# Altium PCB EtherWiz_3K4KNic.PcbDoc (part 1 of 2)
Units mil, origin at the board's own origin, x right, y up, seen from the top; angles counter-clockwise.
Board outline 3909 x 1834 mil, 4 copper layers (Top Layer, GND, 5V, Bottom Layer), stack 62.295 mil thick; 71 components, 121 nets, 446 pads, 217 vias.
Unrouted connection lines stored in the file: 7.
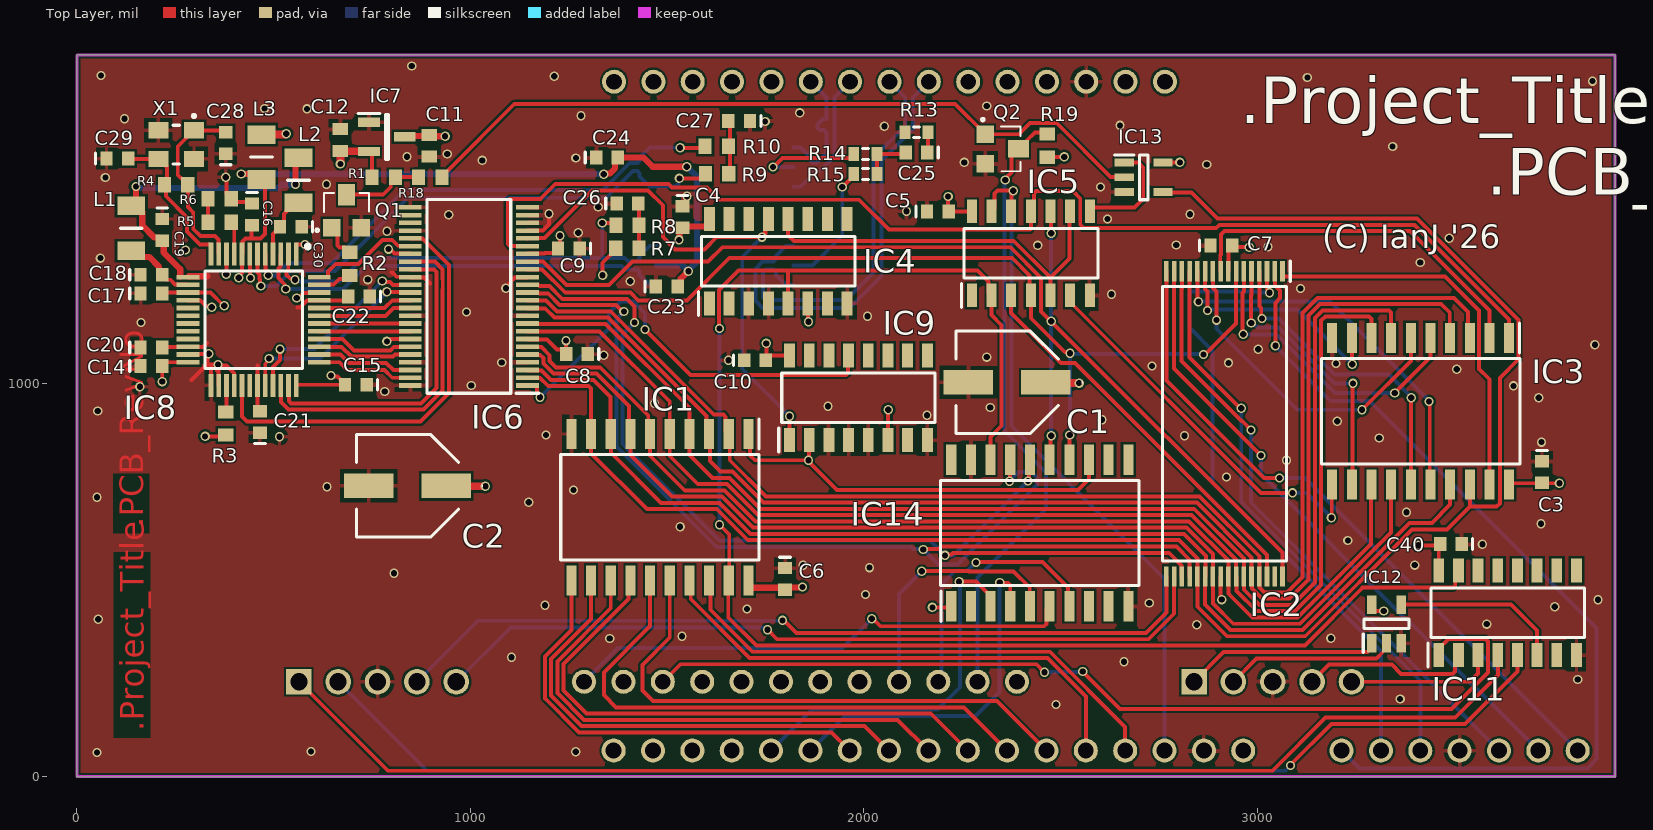
[diagram p0: Top Layer view]
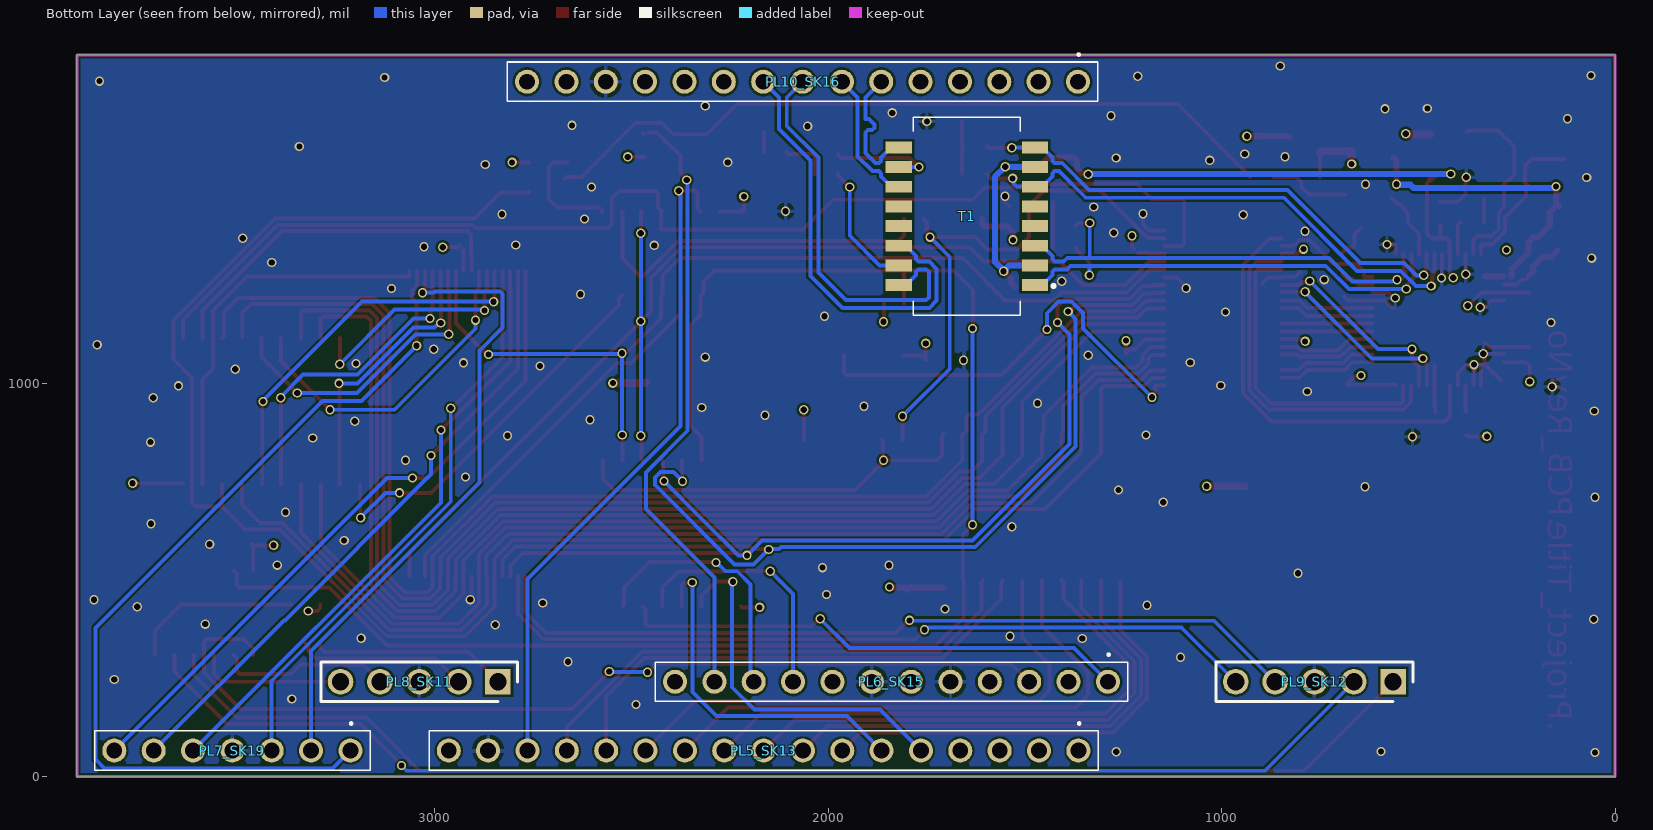
[diagram p1: Bottom Layer view, seen from below]
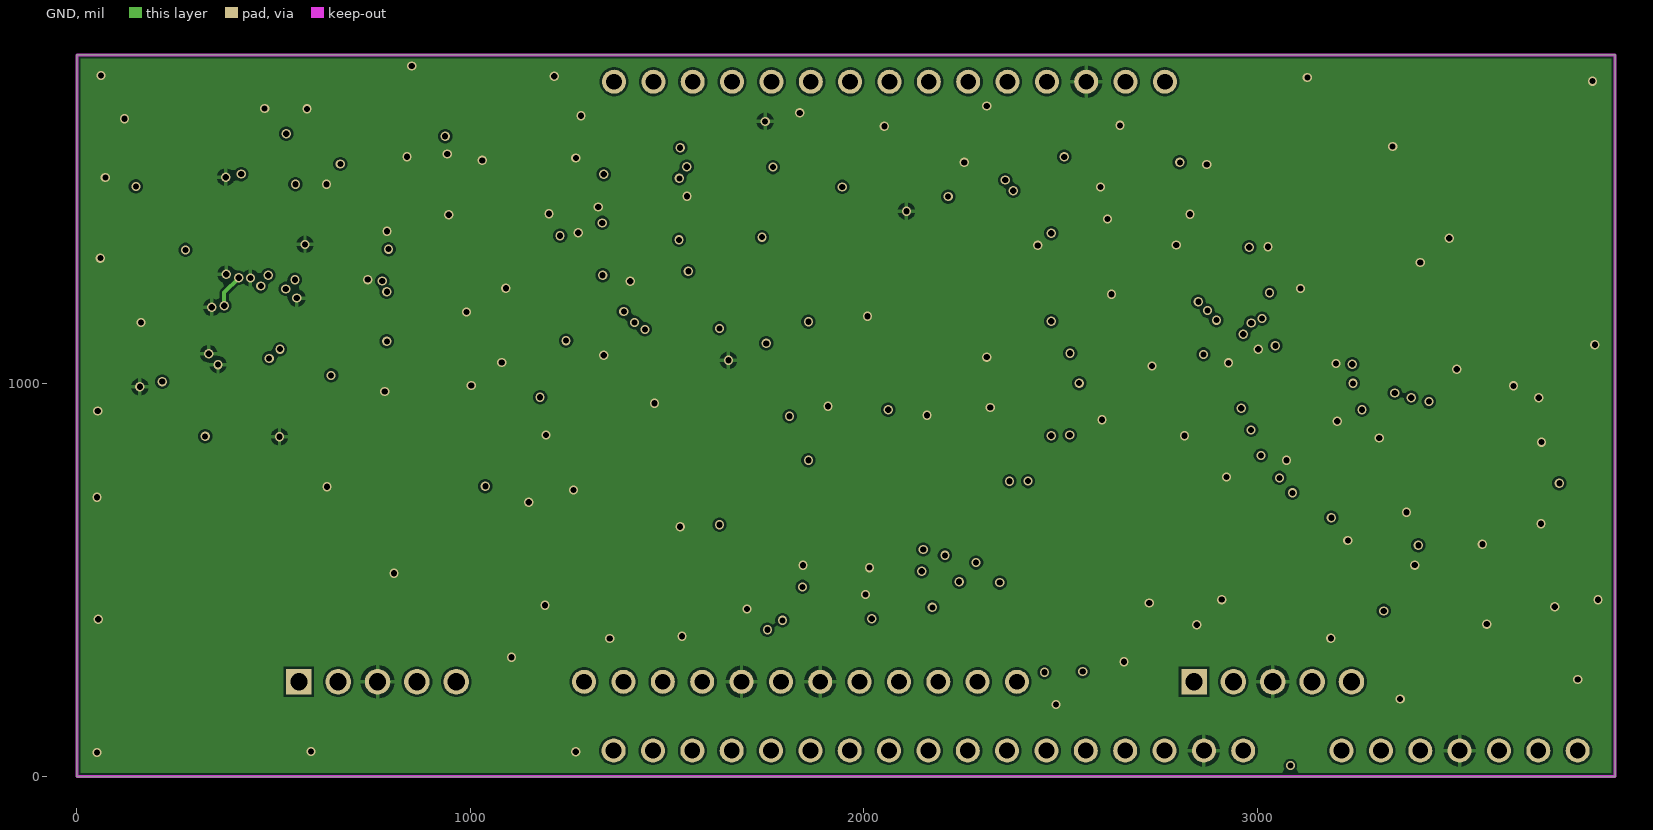
[diagram p2: GND]
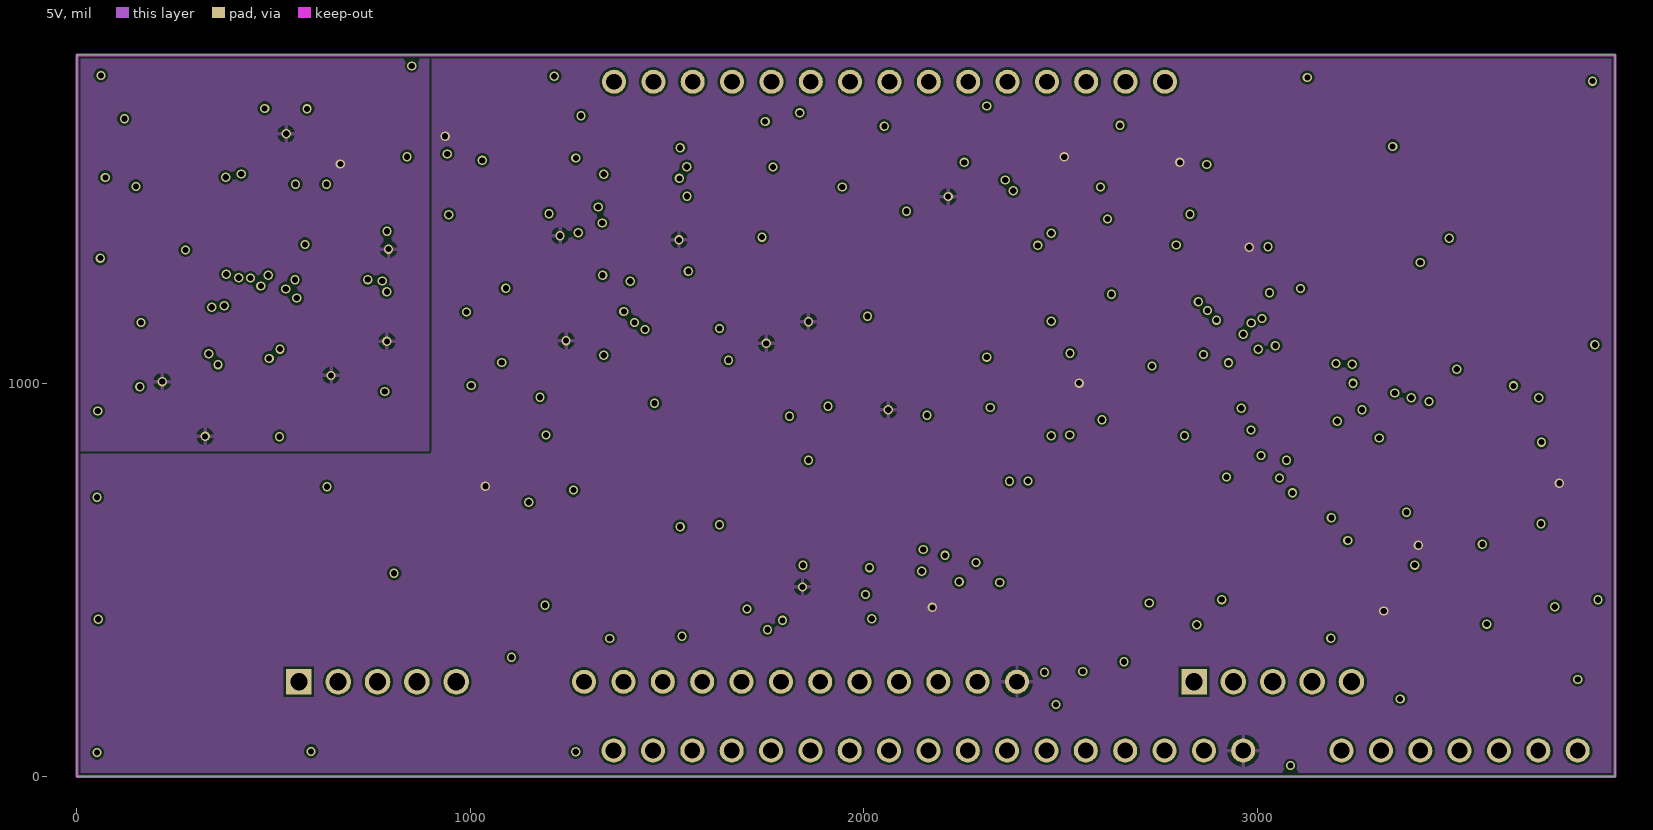
[diagram p3: 5V]
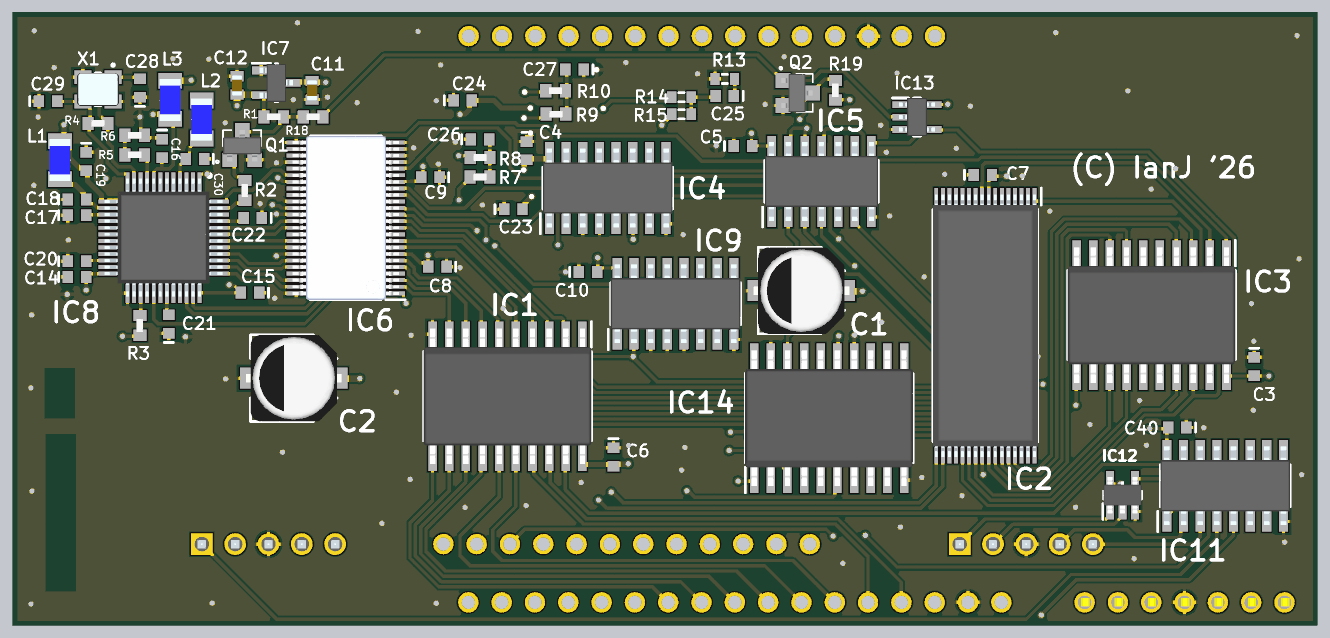
[diagram p5: 3D render of the assembled board from above, using the file's embedded part models]
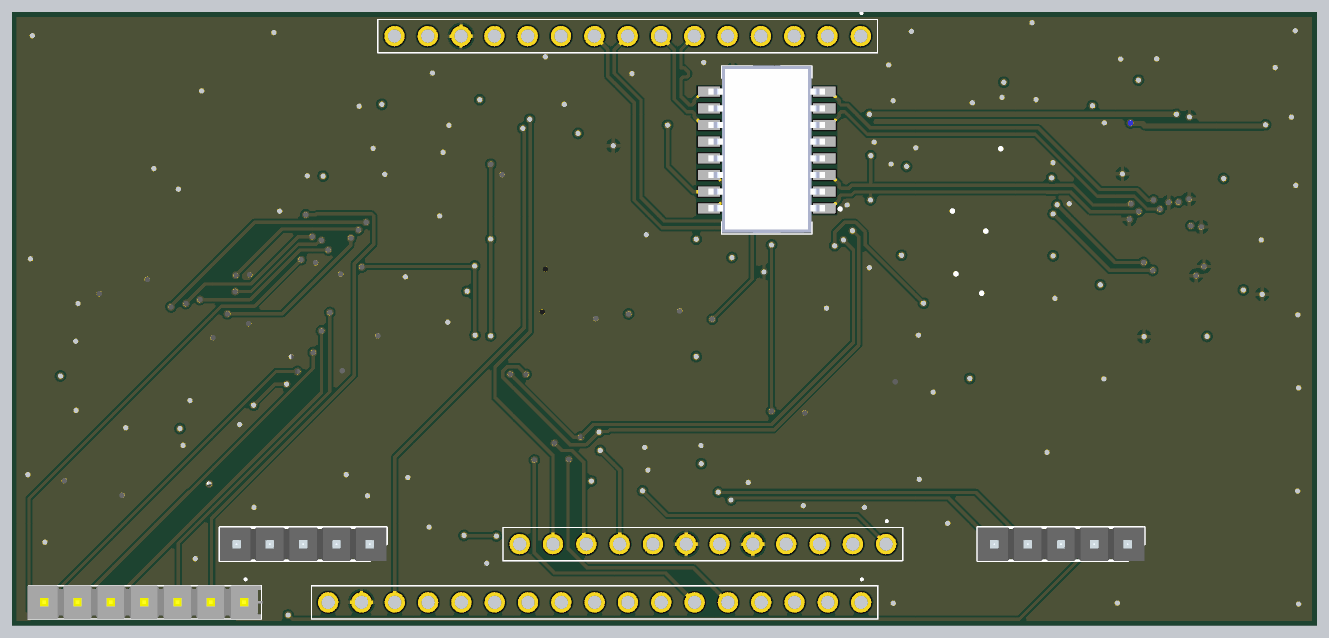
[diagram p6: 3D render of the assembled board from below, using the file's embedded part models]

## Layer stack, top to bottom
Top Solder: solder mask 0.4, Solder Resist, Dk 3.5
Top Layer: signal copper 1.4
Dielectric 1: prepreg 2.8, PP-006, Dk 4.1
GND: signal copper 1.378
Dielectric 2: prepreg 41.3386, PP-006, Dk 4.1
5V: signal copper 1.378
Dielectric2: dielectric 12.6, FR-4, Dk 4.8
Bottom Layer: signal copper 1.4
Bottom Solder: solder mask 0.4, Solder Resist, Dk 3.5

## Board outline
0,0 3909,0 3909,1834 0,1834

## Design rules (kind name [scope] priority, off if disabled: settings)
Clearance [All] p1: gap=5.91 ignorepadtopadclearanceinfootprint=FALSE
DiffPairsRouting [All] p1: maxlimit=10 minlimit=10 mostfreqgap=10 toplayer_minwidth=10 toplayer_maxwidth=15 toplayer_prefwidth=10 midlayer1_minwidth=10 midlayer1_maxwidth=15 midlayer1_prefwidth=10 midlayer2_minwidth=10 midlayer2_maxwidth=15 midlayer2_prefwidth=10 bottomlayer_minwidth=10 bottomlayer_maxwidth=15 bottomlayer_prefwidth=10 maxuncoupledlength=500
PolygonConnect [All] p1: connectstyle=Relief reliefconductorwidth=10 reliefentries=4 polygonreliefangle="90 Angle" airgapwidth=10
RoutingVias [All] p1: holewidth=28 width=50 viastyle="Through Hole" minholewidth=28 minwidth=50 maxholewidth=28 maxwidth=50
SolderMaskExpansion [All] p1: expansion=4 istentingtop=FALSE
SupplyNets "Schematic Supply Nets_3" [InNet('GND')] p1: voltage=0.000
SupplyNets "Schematic Supply Nets_8" [InNet('1v2d')] p2: voltage=0.000
SupplyNets "Schematic Supply Nets_7" [InNet('3v3a')] p3: voltage=0.000
SupplyNets "Schematic Supply Nets_5" [InNet('1v2o')] p4: voltage=0.000
SupplyNets "Schematic Supply Nets_4" [InNet('GND_CHASS')] p5: voltage=0.000
SupplyNets "Schematic Supply Nets_2" [InNet('1v2a')] p6: voltage=0.000
SupplyNets "Schematic Supply Nets_1" [InNet('3v3')] p7: voltage=0.000
SupplyNets "Schematic Supply Nets" [InNet('5V')] p8: voltage=0.000
Width [All] p1: maxlimit=10 minlimit=10 preferedwidth=10
29 further rules are at their usual default settings.

## Classes and differential pairs
component class EtherWiz_ROM: C3 C7
component class EtherWiz: C1 C2 C3 C4 C5 C6 C7 C8 C9 C10 C41 IC1 IC4 IC5 IC6 IC9 IC13 IC14 Q2 R19
component class EtherWiz_3K4KNic: C40 IC11 IC12 PL1 PL2 PL3 PL4 PL5_SK13 PL6_SK15 PL7_SK19 PL8_SK11 PL9_SK12 PL10_SK16
component class EtherWiz_Controller: C11 C12 C14 C15 C16 C17 C18 C19 C20 C21 C22 C23 C24 C25 C26 C27 C28 C29 C30 IC7 IC8 L1 L2 L3 Q1 R1 R2 R3 R4 R5 R6 R7 R8 R9 R10 R13 R14 R15 R18 T1 X1
differential pair TX: +TX_P -TX_N
differential pair RX: +RX_P -RX_N
differential pair ETX: +ETX_P -ETX_N
differential pair ERX: +ERX_P -ERX_N

## Components (designator, comment, footprint, x,y, rotation, side; value= is the part's Value field where it differs from the comment)
C1 "EEE-HA1C470AP" EEE1AA101SP 2364,1002 r180 top
C2 "EEE-HA1C470AP" EEE1AA101SP 840,739 r180 top
C3 "100n" CAPC1608L 3723.41,773.98 r270 top
C4 "100n" CAPC1608L 1539,1422 r270 top
C5 "100n" CAPC1608L 2187.98,1436 r0 top
C6 "100n" CAPC1608L 1799.67,502.43 r270 top
C7 "100n" CAPC1608L 2908.45,1349.39 r0 top
C8 "100n" CAPC1608L 1271,1074 r180 top
C9 "100n" CAPC1608L 1250,1342 r180 top
C10 "100n" CAPC1608L 1723.41,1058.05 r0 top
C11 "1uF" CAPC1608X90N 895.05,1603.31 r90 top
C12 "1uF" CAPC1608X90N 669.53,1617.88 r270 top
C14 "100n" CAPC1608L 189.21,1043.08 r0 top
C15 "100n" CAPC1608L 708.9,995.83 r180 top
C16 "100n" CAPC1608L 445.12,1428.91 r270 top
C17 "100n" CAPC1608L 189.21,1228.12 r0 top
C18 "100nF" CAPC1608L 189.21,1275.36 r0 top
C19 "100nF" CAPC1608L 216.77,1389.54 r270 top
C20 "100nF" CAPC1608L 189.21,1090.32 r0 top
C21 "100nF" CAPC1608L 464.8,901.35 r90 top
C22 "100nF" CAPC1608L 716.77,1220.24 r180 top
C23 "100nF" CAPC1608L 1499,1246 r0 top
C24 "100nF" CAPC1608L 1347,1573 r0 top
C25 "1nF" CAPC1608L 2133.8,1586.29 r180 top
C26 "100nF" CAPC1608L 1399,1456 r0 top
C27 "100nF" CAPC1608L 1683,1666 r180 top
C28 "24pF" CAPC1608L 378.19,1610.01 r90 top
C29 "24pF" CAPC1608L 102.6,1570.64 r0 top
C30 "100nF" CAPC1608L 543.54,1397.41 r180 top
C40 "100n" CAPC1608L 3492,591 r180 top
IC1 "SN74HCT245DWR" SOIC127P1030X265-20N 1481.6,684.55 r270 top
IC2 "MX29F040CTI-70G" SOP50P2000X120-32N 2916.32,896.63 r270 top locked
IC3 "SN74HCT273DWR" SOIC127P1030X265-20N 3414.94,928.51 r270 top locked
IC4 "74HCT138D,653" SOIC127P600X175-16N 1782.46,1310.02 r90 top locked
IC5 "74HCT32D" SOIC127P600X175-14N 2424.2,1329.7 r90 top locked
IC6 "74ALVC164245DGG_11" SOP50P810X120-48N 996.3,1220.24 r180 top
IC7 "MCP1703AT-3302E_CB" SOT95P255X145-3N 787.64,1625.76 r0 top
IC8 "W6100L" QFP50P900X900X160-48N 449.06,1161.19 r270 top
IC9 "CD74HCT238M96" SOIC127P600X175-16N 1986.2,962.57 r90 top locked
IC11 "74HCT138D,653" SOIC127P600X175-16N 3636,416 r90 top
IC12 "SN74LVC1G08QDBVRQ1" SOT95P280X145-5N 3328,388 r90 top
IC13 "74HCT1G125GV125" SOT95P275X110-5N 2711,1523 r0 top
IC14 "SN74HCT245DWR" SOIC127P1030X265-20N 2447,619 r90 top
L1 "782763800" INDC3216X130N 138.03,1393.47 r90 top
L2 "782763800" INDC3216X130N 563.23,1515.52 r270 top
L3 "782763800" INDC3216X130N 468.74,1574.57 r270 top
PL5_SK13 "EW-17-12-G-S-550" TSW-117-XX-YY-S 1364,66 r0 bottom locked
PL6_SK15 "TSW-112-05-G-S" TSW-112-XX-YY-S 1289,241 r0 bottom locked
PL7_SK19 "TSW-107-05-G-S" TSW-107-XX-YY-S 3214,66 r0 bottom locked
PL8_SK11 "TSW-105-05-G-S-LL" HDRV5W64P0X254_1X5_1270X254X521P 2839,241 r180 bottom locked
PL9_SK12 "TSW-105-05-G-S-LL" HDRV5W64P0X254_1X5_1270X254X521P 564,241 r180 bottom locked
PL10_SK16 "TSW-115-05-G-S" TSW-115-XX-YY-S 1365,1766 r0 bottom locked
Q1 "BC846" SOT-23 685.28,1436.78 r0 top
Q2 "BC846" SOT-23 2350.61,1595.02 r270 top
R1 "100K" RESC1608X50N 779.76,1523.39 r180 top
R2 "2K2" RESC1608X50N 693.15,1302.92 r90 top
R3 "2K2" RESC1608X50N 378.19,897.41 r270 top
R4 "1M" RESC1608X50N 252.2,1503.71 r0 top
R5 "12K" RESC1608X50N 362.44,1409.22 r0 top
R6 "300R" RESC1608X50N 362.44,1468.28 r180 top
R7 "50R" RESC1608X50N 1399,1343 r180 top
R8 "50R" RESC1608X50N 1399.19,1401.49 r180 top
R9 "50R" RESC1608X50N 1627,1532 r180 top
R10 "50R" RESC1608X50N 1626,1602 r180 top
R13 "0R" RESC1608L 2133.8,1637.47 r0 top
R14 "75R" RESC1608L 2003.87,1582.35 r180 top
R15 "75R" RESC1608L 2003.87,1531.17 r180 top
R18 "2K2" RESC1608X50N 897.87,1523.39 r0 top
R19 "100K" RESC1608X50N 2465.92,1603.6 r270 top
T1 "PT61017PEL" PT61017PEL 1622,1424 r90 bottom locked
X1 "25MHz" ABM810000MHZ12D2W 252.2,1606.07 r180 top

## Footprints (in the part's own frame and the unit in brackets; to place one, negate y for a bottom-side part, rotate by r counter-clockwise, add the part's x,y. Pads: shape width x height; smd on the part's side, far side on the other; paste and mask are expansions set on the pad)
ABM810000MHZ12D2W [mm]
  rect 1.3x1.05 smd: 1(-1.15,-0.925) 2(1.15,-0.925) 3(1.15,0.925) 4(-1.15,0.925)
  silkscreen extent -1.25,-1.95 0.2,1.25, body extent -1.6,-1.25 1.6,1.25, height 0.8
CAPC1608L [mm] "Chip Capacitor, Body 1.6x0.8mm, IPC High Density"
  rect 0.8x0.9 smd: 1(-0.7,0) 2(0.7,0)
  silkscreen extent -1.4,-0.35 -1.4,0.35, body extent -0.87,-0.48 0.87,0.48, height 0.85
CAPC1608X90N [mm]
  rect 0.78x0.99 smd: 1(-0.7,0) 2(0.7,0)
  body extent -0.8,-0.41 0.8,0.41, height 0.9
EEE1AA101SP [mm]
  rect 3.2x1.6 smd: 1(-2.5,0) 2(2.5,0)
  silkscreen extent -4.88,-3.3 3.3,3.3, body extent 0,0 0,0
HDRV5W64P0X254_1X5_1270X254X521P [mm]
  rect 1.65x1.65 hole 1.1: 1(0,0)
  round 1.65 hole 1.1: 2(-2.54,0) 3(-5.08,0) 4(-7.62,0) 5(-10.16,0)
  silkscreen extent -11.43,-1.27 1.27,1.27, body extent -11.43,-1.27 1.27,1.27, height 5.21
INDC3216X130N [mm]
  rect 1.2x1.8 smd: 1(-1.45,0) 2(1.45,0)
  silkscreen extent 0,-0.7 0,0.7, body extent -1.6,-0.8 1.6,0.8, height 1.3
PT61017PEL [mm]
  rect 0.76x1.7 smd: 1(-4.445,-3.75) 2(-3.175,-3.75) 3(-1.905,-3.75) 4(-0.635,-3.75) 5(0.635,-3.75) 6(1.905,-3.75) 7(3.175,-3.75) 8(4.445,-3.75) 9(4.445,5.05) 10(3.175,5.05) 11(1.905,5.05) 12(0.635,5.05) 13(-0.635,5.05) 14(-1.905,5.05) 15(-3.175,5.05) 16(-4.445,5.05)
  silkscreen extent -6.4,-5.05 6.4,4.1, body extent -6.33,-3.8 6.45,5.1, height 5.14
QFP50P900X900X160-48N [mm]
  rect 1.475x0.3 smd: 1(-4.238,2.75) 2(-4.238,2.25) 3(-4.238,1.75) 4(-4.238,1.25) 5(-4.238,0.75) 6(-4.238,0.25) 7(-4.238,-0.25) 8(-4.238,-0.75) 9(-4.238,-1.25) 10(-4.238,-1.75) 11(-4.238,-2.25) 12(-4.238,-2.75) 25(4.238,-2.75) 26(4.238,-2.25) 27(4.238,-1.75) 28(4.238,-1.25) 29(4.238,-0.75) 30(4.238,-0.25) 31(4.238,0.25) 32(4.238,0.75) 33(4.238,1.25) 34(4.238,1.75) 35(4.238,2.25) 36(4.238,2.75)
  rect 0.3x1.475 smd: 13(-2.75,-4.238) 14(-2.25,-4.238) 15(-1.75,-4.238) 16(-1.25,-4.238) 17(-0.75,-4.238) 18(-0.25,-4.238) 19(0.25,-4.238) 20(0.75,-4.238) 21(1.25,-4.238) 22(1.75,-4.238) 23(2.25,-4.238) 24(2.75,-4.238) 37(2.75,4.238) 38(2.25,4.238) 39(1.75,4.238) 40(1.25,4.238) 41(0.75,4.238) 42(0.25,4.238) 43(-0.25,4.238) 44(-0.75,4.238) 45(-1.25,4.238) 46(-1.75,4.238) 47(-2.25,4.238) 48(-2.75,4.238)
  silkscreen extent -4.85,-3.15 3.15,3.63, body extent -4.5,-4.5 4.5,4.5, height 1.6
RESC1608L [mm] "Chip Resistor, Body 1.6x0.8mm, IPC High Density"
  rect 0.7x0.9 smd: 1(-0.75,0) 2(0.75,0)
  silkscreen extent -0.2,-0.35 0.2,0.35, body extent -0.8,-0.41 0.8,0.41, height 0.45
RESC1608X50N [mm]
  rect 0.85x1 smd: 1(-0.75,0) 2(0.75,0)
  body extent -0.5,-0.25 0.5,0.25, height 0.35
SOIC127P600X175-14N [mm]
  rect 1.525x0.65 smd: 1(-2.712,3.81) 2(-2.712,2.54) 3(-2.712,1.27) 4(-2.712,0) 5(-2.712,-1.27) 6(-2.712,-2.54) 7(-2.712,-3.81) 8(2.712,-3.81) 9(2.712,-2.54) 10(2.712,-1.27) 11(2.712,0) 12(2.712,1.27) 13(2.712,2.54) 14(2.712,3.81)
  silkscreen extent -3.47,-4.33 1.6,4.48, body extent -3,-4.33 3,4.33, height 1.75
SOIC127P600X175-16N [mm]
  rect 1.55x0.7 smd: 1(-2.725,4.445) 2(-2.725,3.175) 3(-2.725,1.905) 4(-2.725,0.635) 5(-2.725,-0.635) 6(-2.725,-1.905) 7(-2.725,-3.175) 8(-2.725,-4.445) 9(2.725,-4.445) 10(2.725,-3.175) 11(2.725,-1.905) 12(2.725,-0.635) 13(2.725,0.635) 14(2.725,1.905) 15(2.725,3.175) 16(2.725,4.445)
  silkscreen extent -3.5,-4.95 1.6,5.15, body extent -3,-4.95 3,4.95, height 1.75
SOIC127P1030X265-20N [mm]
  rect 1.95x0.65 smd: 1(-4.725,5.715) 2(-4.725,4.445) 3(-4.725,3.175) 4(-4.725,1.905) 5(-4.725,0.635) 6(-4.725,-0.635) 7(-4.725,-1.905) 8(-4.725,-3.175) 9(-4.725,-4.445) 10(-4.725,-5.715) 11(4.725,-5.715) 12(4.725,-4.445) 13(4.725,-3.175) 14(4.725,-1.905) 15(4.725,-0.635) 16(4.725,0.635) 17(4.725,1.905) 18(4.725,3.175) 19(4.725,4.445) 20(4.725,5.715)
  silkscreen extent -5.7,-6.4 3.4,6.4, body extent -5.16,-6.4 5.16,6.4, height 1.75
SOP50P810X120-48N [mm]
  rect 1.475x0.3 smd: 1(-3.788,5.75) 2(-3.788,5.25) 3(-3.788,4.75) 4(-3.788,4.25) 5(-3.788,3.75) 6(-3.788,3.25) 7(-3.788,2.75) 8(-3.788,2.25) 9(-3.788,1.75) 10(-3.788,1.25) 11(-3.788,0.75) 12(-3.788,0.25) 13(-3.788,-0.25) 14(-3.788,-0.75) 15(-3.788,-1.25) 16(-3.788,-1.75) 17(-3.788,-2.25) 18(-3.788,-2.75) 19(-3.788,-3.25) 20(-3.788,-3.75) 21(-3.788,-4.25) 22(-3.788,-4.75) 23(-3.788,-5.25) 24(-3.788,-5.75) 25(3.788,-5.75) 26(3.788,-5.25) 27(3.788,-4.75) 28(3.788,-4.25) 29(3.788,-3.75) 30(3.788,-3.25) 31(3.788,-2.75) 32(3.788,-2.25) 33(3.788,-1.75) 34(3.788,-1.25) 35(3.788,-0.75) 36(3.788,-0.25) 37(3.788,0.25) 38(3.788,0.75) 39(3.788,1.25) 40(3.788,1.75) 41(3.788,2.25) 42(3.788,2.75) 43(3.788,3.25) 44(3.788,3.75) 45(3.788,4.25) 46(3.788,4.75) 47(3.788,5.25) 48(3.788,5.75)
  silkscreen extent -4.52,-6.25 2.7,6.25, body extent -4.06,-6.25 4.06,6.25, height 1
SOP50P2000X120-32N [mm]
  rect 1.3x0.3 smd: 1(-9.85,3.75) 2(-9.85,3.25) 3(-9.85,2.75) 4(-9.85,2.25) 5(-9.85,1.75) 6(-9.85,1.25) 7(-9.85,0.75) 8(-9.85,0.25) 9(-9.85,-0.25) 10(-9.85,-0.75) 11(-9.85,-1.25) 12(-9.85,-1.75) 13(-9.85,-2.25) 14(-9.85,-2.75) 15(-9.85,-3.25) 16(-9.85,-3.75) 17(9.85,-3.75) 18(9.85,-3.25) 19(9.85,-2.75) 20(9.85,-2.25) 21(9.85,-1.75) 22(9.85,-1.25) 23(9.85,-0.75) 24(9.85,-0.25) 25(9.85,0.25) 26(9.85,0.75) 27(9.85,1.25) 28(9.85,1.75) 29(9.85,2.25) 30(9.85,2.75) 31(9.85,3.25) 32(9.85,3.75)
  silkscreen extent -10.5,-4 8.85,4.25, body extent -10,-4 10,4, height 1.2
SOT95P255X145-3N [mm]
  rect 1.4x0.6 smd: 1(-1.15,0.95) 2(-1.15,-0.95) 3(1.15,0)
  silkscreen extent -1.85,-1.45 0.1,1.5, body extent -1.28,-1.45 1.28,1.45, height 1.45
SOT95P275X110-5N [mm]
  rect 1.25x0.5 smd: 1(-1.25,0.95) 2(-1.25,0) 3(-1.25,-0.95) 4(1.25,-0.95) 5(1.25,0.95)
  silkscreen extent -1.88,-1.45 0.28,1.45, body extent -1.38,-1.45 1.38,1.45, height 1.1
SOT95P280X145-5N [mm]
  rect 1.2x0.6 smd: 1(-1.25,0.95) 2(-1.25,0) 3(-1.25,-0.95) 4(1.25,-0.95) 5(1.25,0.95)
  silkscreen extent -1.85,-1.45 0.3,1.5, body extent -1.4,-1.45 1.4,1.45, height 1.2
SOT-23 [mil]
  rect 44x44 smd: 1(-37.5,-42) 2(37.5,-42)
  rect 44x54 smd: 3(-0.25,42)
  silkscreen extent -79,-52 57,47, body extent -57,-47 57,47, height 40
TSW-107-XX-YY-S [mm]
  round 1.55 hole 1.02: 1(0,0) 2(2.54,0) 3(5.08,0) 4(7.62,0) 5(10.16,0) 6(12.7,0) 7(15.24,0)
  silkscreen extent -1.27,-1.8 16.51,1.27, body extent -1.34,-1.29 16.57,1.25, height 9.97
TSW-112-XX-YY-S [mm]
  round 1.55 hole 1.02: 1(0,0) 2(2.54,0) 3(5.08,0) 4(7.62,0) 5(10.16,0) 6(12.7,0) 7(15.24,0) 8(17.78,0) 9(20.32,0) 10(22.86,0) 11(25.4,0) 12(27.94,0)
  silkscreen extent -1.27,-1.8 29.21,1.27
TSW-115-XX-YY-S [mm]
  round 1.55 hole 1.02: 1(0,0) 2(2.54,0) 3(5.08,0) 4(7.62,0) 5(10.16,0) 6(12.7,0) 7(15.24,0) 8(17.78,0) 9(20.32,0) 10(22.86,0) 11(25.4,0) 12(27.94,0) 13(30.48,0) 14(33.02,0) 15(35.56,0)
  silkscreen extent -1.27,-1.8 36.83,1.27
TSW-117-XX-YY-S [mm]
  round 1.55 hole 1.02: 1(0,0) 2(2.54,0) 3(5.08,0) 4(7.62,0) 5(10.16,0) 6(12.7,0) 7(15.24,0) 8(17.78,0) 9(20.32,0) 10(22.86,0) 11(25.4,0) 12(27.94,0) 13(30.48,0) 14(33.02,0) 15(35.56,0) 16(38.1,0) 17(40.64,0)
  silkscreen extent -1.27,-1.8 41.91,1.27

## Part data
C1 C2: "Capacitor Polarised", Manufacturer_Name=Panasonic, Mouser Part Number=667-EEE-HA1C470AP, Arrow Part Number=EEE-HA1C470AP, Arrow Price/Stock=https://www.arrow.com/en/products/eeeha1c470ap/panasonic?utm_currency=USD&region=europe, Datasheet Link=http://industrial.panasonic.com/cdbs/www-data/pdf/RDE0000/ABA0000C1148.pdf, Height=7.8mm, Manufacturer_Part_Number=EEE-HA1C470AP, Mouser Price/Stock=https://www.mouser.co.uk/ProductDetail/Panasonic/EEE-HA1C470AP?qs=d1CqaRUMZD%2FL5qU1hDRerg%3D%3D
C3 C4 C5 C6 C7 C8 C9 C10 C14 C15 C16 C17 C40: library part CAP_100n_0603_50V_0, "CAP 100nF, 0603, 50V, X7R, 10%", Distributor1 Part No=CL10B104KB8NNNC, Distributor2 Part No=311-1344-2-ND, Manufacturer1=Samsung, Manufacturer2=Yageo, Voltage=50V, ComponentLink1Description=ComponentLinknURL1, ComponentLink1URL=https://media.digikey.com/pdf/Data%20Sheets/Samsung%20PDFs/CL_Series_MLCC_ds.pdf, ComponentLink2Description=ComponentLinknURL2, ComponentLink2URL=https://www.yageo.com/upload/media/product/productsearch/datasheet/mlcc/UPY-GPHC_X7R_6.3V-to-50V_18.pdf, Distributor1=Anglia, Distributor2=Digikey, ManuPart1=CL10B104KB8NNNC, ManuPart2=CC0603KRX7R9BB104
C11 C12: library part CL10A105KP8NNNC, "Capacitor", Manufacturer_Name=SAMSUNG, Mouser Part Number=187-CL10A105KP8NNNC, Arrow Part Number=CL10A105KP8NNNC, Arrow Price/Stock=https://www.arrow.com/en/products/cl10a105kp8nnnc/samsung-electro-mechanics?utm_currency=USD&region=nac, Datasheet Link=https://datasheet.lcsc.com/szlcsc/Samsung-Electro-Mechanics-CL10A105KP8NNNC_C26413.pdf, Height=0.9mm, Manufacturer_Part_Number=CL10A105KP8NNNC, Mouser Price/Stock=https://www.mouser.co.uk/ProductDetail/Samsung-Electro-Mechanics/CL10A105KP8NNNC?qs=349EhDEZ59qtu6tL%2F73n2A%3D%3D
C18 C19 C20 C21 C22 C30: library part 100nF0805, "Capacitor", Arrow Part Number=C2012X7R1H104K125AM, LCSC Part #=C111492, Manufacturer_Name=TDK, Mouser Part Number=810-C2012X7R1H104KT5, Arrow Price/Stock=https://www.arrow.com/en/products/c2012x7r1h104k125am/tdk, Datasheet Link=https://product.tdk.com/info/en/catalog/datasheets/mlcc_commercial_midvoltage_en.pdf, Height=1.45mm, Manufacturer_Part_Number=C2012X7R1H104K125AM, Mouser Price/Stock=https://www.mouser.com/Search/Refine.aspx?Keyword=810-C2012X7R1H104KT5
C23 C24 C26 C27: library part 909-0001-L, "Cap ceramic X7R/X5R 100nF 10% 16V C0603", Disti Part Number=432-210, LCSC Part #=C66501, Manufacturer=EPCOS, Tolerance=0.1, Voltage=16V, Component Type=Standard, Construction=X7R, Cost(£)=0.038, Distributer=Farnell, ManuPart=B37931-K9104-K60, Qualified2ndManu=Yageo, Qualified2ndPart=CC0603KRX7R7BB104, RoHS Compliant=YES
C25: library part 910-0053-L, "Cap ceramic X7R 1nF 10% 2kV C1206", Disti Part Number=1206GC102KAT1A, LCSC Part #=C23631, Manufacturer=AVX, Tolerance=0.1, Voltage=2000V, Component Type=Standard, Construction=X7R, Cost(£)=0.187, Distributer=Anglia, ManuPart=1206GC102KAT1A, RoHS Compliant=YES
C28 C29: library part CAP_10P_0603_50V_0, "CAP 10PF, 0603, 50V, NP0, 10%"
IC1 IC14: "Integrated Circuit", Manufacturer_Name="Texas Instruments", Mouser Part Number=595-SN74HCT245DWR, Arrow Part Number=SN74HCT245DWR, Arrow Price/Stock=https://www.arrow.com/en/products/sn74hct245dwr/texas-instruments?region=nac, Datasheet Link=https://datasheet.datasheetarchive.com/originals/distributors/SFDatasheet-6/sf-000131457.pdf, Height=2.65mm, Manufacturer_Part_Number=SN74HCT245DWR, Mouser Price/Stock=https://www.mouser.co.uk/ProductDetail/Texas-Instruments/SN74HCT245DWR?qs=st7IWvlL5%2FhHLMwvvkYTgw%3D%3D
IC2: "Integrated Circuit", Manufacturer_Name=Macronix, Arrow Part Number=MX29F040CTI-70G, Arrow Price/Stock=https://www.arrow.com/en/products/mx29f040cti-70g/macronix-international?region=nac, Datasheet Link=https://www.macronix.com/Lists/Datasheet/Attachments/7266/MX29F040C,%205V,%204Mb,%20v2.2.pdf, Height=1.2mm, Manufacturer_Part_Number=MX29F040CTI-70G
IC3: "Integrated Circuit", Manufacturer_Name="Texas Instruments", Mouser Part Number=595-SN74HCT273DWR, Arrow Part Number=SN74HCT273DWR, Arrow Price/Stock=https://www.arrow.com/en/products/sn74hct273dwr/texas-instruments, Datasheet Link=https://datasheet.datasheetarchive.com/originals/distributors/Datasheets-36/DSA-718641.pdf, Height=2.65mm, Manufacturer_Part_Number=SN74HCT273DWR, Mouser Price/Stock=https://www.mouser.co.uk/ProductDetail/Texas-Instruments/SN74HCT273DWR?qs=SL3LIuy2dWww%2FZr6up0MdA%3D%3D
IC4 IC11: "Integrated Circuit", Manufacturer_Name=Nexperia, Mouser Part Number=771-74HCT138D-T, Arrow Part Number=74HCT138D,653, Arrow Price/Stock=https://www.arrow.com/en/products/74hct138d653/nexperia?region=nac, Datasheet Link=https://assets.nexperia.com/documents/data-sheet/74HC_HCT138.pdf, Height=1.75mm, Manufacturer_Part_Number=74HCT138D,653, Mouser Price/Stock=https://www.mouser.co.uk/ProductDetail/Nexperia/74HCT138D653?qs=P62ublwmbi8MKahyK7iY6g%3D%3D
IC5: "Integrated Circuit", Manufacturer_Name=Toshiba, Mouser Part Number=N/A, Arrow Part Number=74HCT32D, Arrow Price/Stock=https://www.arrow.com/en/products/74hct32d/toshiba?region=nac, Datasheet Link=https://toshiba.semicon-storage.com/info/docget.jsp?did=37176&prodName=74HCT32D, Height=1.75mm, Manufacturer_Part_Number=74HCT32D, Mouser Price/Stock=https://www.mouser.co.uk/ProductDetail/Toshiba/74HCT32D?qs=j%252B1pi9TdxUZqVZos7uP1Yw%3D%3D
IC6: "Integrated Circuit", Arrow Part Number=74ALVC164245DGG:11, Manufacturer_Name=Nexperia, Mouser Part Number=771-74ALVC164245, Arrow Price/Stock=https://www.arrow.com/en/products/74alvc164245dgg11/nexperia?utm_currency=USD&region=nac, Datasheet Link=https://assets.nexperia.com/documents/data-sheet/74ALVC164245.pdf, Height=1.2mm, Manufacturer_Part_Number=74ALVC164245DGG:11, Mouser Price/Stock=https://www.mouser.co.uk/ProductDetail/Nexperia/74ALVC164245DGG11?qs=odJ8N4Y39o4j0ykFPcnqaQ%3D%3D
IC7: "Integrated Circuit", Arrow Part Number=MCP1703AT-3302E/CB, Manufacturer_Name=Microchip, Mouser Part Number=579-MCP1703AT3302ECB, Arrow Price/Stock=https://www.arrow.com/en/products/mcp1703at-3302ecb/microchip-technology?region=nac, Datasheet Link=http://uk.rs-online.com/web/p/products/7709509, Height=1.45mm, Manufacturer_Part_Number=MCP1703AT-3302E/CB, Mouser Price/Stock=https://www.mouser.co.uk/ProductDetail/Microchip-Technology/MCP1703AT-3302E-CB?qs=PZkJWYMe7leeY97bgTp%252B9w%3D%3D
IC8: "Integrated Circuit", Manufacturer_Name="WIZnet Inc", Mouser Part Number=950-W6100L, Datasheet Link=https://eu.mouser.com/datasheet/2/443/w6100_ds_v104e-1994614.pdf, Height=1.6mm, Manufacturer_Part_Number=W6100L, Mouser Price/Stock=https://www.mouser.co.uk/ProductDetail/WIZnet/W6100L?qs=pUKx8fyJudARLmbJE2EKlA%3D%3D
IC9: "Integrated Circuit", Manufacturer_Name="Texas Instruments", Mouser Part Number=595-CD74HCT238M96, Datasheet Link=http://www.ti.com/lit/gpn/cd74hct238, Height=1.75mm, Manufacturer_Part_Number=CD74HCT238M96, Mouser Price/Stock=https://www.mouser.co.uk/ProductDetail/Texas-Instruments/CD74HCT238M96?qs=xFfolx0DHx1u%2Fks4%2FbIqqQ%3D%3D
IC12: "Integrated Circuit", Manufacturer_Name="Texas Instruments", Mouser Part Number=595-SN74LVC1G08QDBQ1, Arrow Part Number=SN74LVC1G08QDBVRQ1, Arrow Price/Stock=https://www.arrow.com/en/products/sn74lvc1g08qdbvrq1/texas-instruments?utm_currency=USD&region=nac, Datasheet Link=http://www.ti.com/lit/ds/symlink/sn74lvc1g08-q1.pdf, Height=1.45mm, Manufacturer_Part_Number=SN74LVC1G08QDBVRQ1, Mouser Price/Stock=https://www.mouser.co.uk/ProductDetail/Texas-Instruments/SN74LVC1G08QDBVRQ1?qs=PVVDbbWpW3K%252BPBrUmLG6eg%3D%3D
IC13: "Integrated Circuit", Manufacturer_Name=Nexperia, Datasheet Link=https://assets.nexperia.com/documents/data-sheet/74HC_HCT1G125.pdf, Height=1.1mm, Manufacturer_Part_Number=74HCT1G125GV125
L1 L2 L3: library part 74279215, "Inductor", Manufacturer_Name="Wurth Elektronik", Mouser Part Number=710-782763800, Datasheet Link=http://componentsearchengine.com/Datasheets/1/74279215.pdf, Height=1.3mm, Manufacturer_Part_Number=782763800, Mouser Price/Stock=https://www.mouser.co.uk/ProductDetail/Wurth-Elektronik/74279215?qs=5twSNpOB8IC%252BebnV0jQtuw%3D%3D
PL5_SK13: library part TSW-117-05-G-S, "Connector", Manufacturer_Name=SAMTEC, Datasheet Link=http://suddendocs.samtec.com/prints/tsw-xxx-xx-xxx-x-xx-xxx-mkt.pdf, Manufacturer_Part_Number=TSW-117-05-G-S
PL6_SK15 PL7_SK19 PL8_SK11 PL9_SK12 PL10_SK16: "Connector", Manufacturer_Name=SAMTEC
  PL6_SK15: Datasheet Link=http://suddendocs.samtec.com/prints/tsw-xxx-xx-xxx-x-xx-xxx-mkt.pdf, Manufacturer_Part_Number=TSW-112-05-G-S
  PL7_SK19: Datasheet Link=http://suddendocs.samtec.com/prints/tsw-xxx-xx-xxx-x-xx-xxx-mkt.pdf, Manufacturer_Part_Number=TSW-107-05-G-S
  PL8_SK11 PL9_SK12: Datasheet Link=https://componentsearchengine.com/Datasheets/2/TSW-105-05-G-S-LL.pdf, Height=5.21mm, Manufacturer_Part_Number=TSW-105-05-G-S-LL
  PL10_SK16: Datasheet Link=http://suddendocs.samtec.com/prints/tsw-xxx-xx-xxx-x-xx-xxx-mkt.pdf, Manufacturer_Part_Number=TSW-115-05-G-S
Q1 Q2: library part TRANS_NPN_BC846_0, "Transistor NPN, 65V, 100mA, TO-236AB/SOT23"
R1 R19: library part 920-0030-L, "Resistor 100K 1%  0603"
R2 R3 R18: library part 920-0030-L, "Resistor 2K2 1%  0603", Disti Part Number=2447434, LCSC Part #=C127449, Manufacturer=Multicomp, Power=63mW, Tolerance=0.01, Component Type=Standard, Construction="Thick Film", Cost(£)=0.025, Distributer=Farnell, ManuPart=MCWR06X75R0FTL, RoHS Compliant=YES
R4: library part 920-0030-L, "Resistor 1M 1%  0603", Disti Part Number=2447434, LCSC Part #=C127449, Manufacturer=Multicomp, Power=63mW, Tolerance=0.01, Component Type=Standard, Construction="Thick Film", Cost(£)=0.025, Distributer=Farnell, ManuPart=MCWR06X75R0FTL, RoHS Compliant=YES
R5: library part 920-0030-L, "Resistor 12K 1%  0603", Disti Part Number=2447434, LCSC Part #=C127449, Manufacturer=Multicomp, Power=63mW, Tolerance=0.01, Component Type=Standard, Construction="Thick Film", Cost(£)=0.025, Distributer=Farnell, ManuPart=MCWR06X75R0FTL, RoHS Compliant=YES
R6: library part 920-0030-L, "Resistor 300R 1%  0603", Disti Part Number=2447434, LCSC Part #=C127449, Manufacturer=Multicomp, Power=63mW, Tolerance=0.01, Component Type=Standard, Construction="Thick Film", Cost(£)=0.025, Distributer=Farnell, ManuPart=MCWR06X75R0FTL, RoHS Compliant=YES
R7 R8 R9 R10: library part 920-0030-L, "Resistor 50R 1%  0603", Disti Part Number=2447434, LCSC Part #=C127449, Manufacturer=Multicomp, Power=63mW, Tolerance=0.01, Component Type=Standard, Construction="Thick Film", Cost(£)=0.025, Distributer=Farnell, ManuPart=MCWR06X75R0FTL, RoHS Compliant=YES
R13: library part 920-0001-L, "Resistor 0R0 1A Max 0603", Disti Part Number=923-3130, LCSC Part #=C844718, Manufacturer=Vishay, Component Type=Standard, Construction="Thick Film", Cost(£)=0.056, Distributer=Farnell, ManuPart=CRCW06030000Z0EA, Qualified2ndManu=Yageo, Qualified2ndPart=RC0603JR-070RL, RoHS Compliant=YES
R14 R15: library part 920-0030-L, "Resistor 75R 1%  0603", Disti Part Number=2447434, LCSC Part #=C127449, Manufacturer=Multicomp, Power=63mW, Tolerance=0.01, Component Type=Standard, Construction="Thick Film", Cost(£)=0.025, Distributer=Farnell, ManuPart=MCWR06X75R0FTL, RoHS Compliant=YES
T1: "Transformer", Disti Part Number=652-PT61017PEL, LCSC Part #=C124001, Manufacturer=Bourns, Arrow Price/Stock=https://www.arrow.com/en/products/pt61017pel/bourns?region=europe, Datasheet Link=http://www.bourns.com/docs/Product-Datasheets/pt61017pel.pdf, Distributer=Mouser, Height=5mm, ManuPart=PT61017PEL, Mouser Price/Stock=https://www.mouser.co.uk/ProductDetail/Bourns/PT61017PEL?qs=0rbOLB9uh%252BASY8PB9lbWrQ%3D%3D
X1: library part ABM8-25.000MHZ-D2X-T, "Crystal or Oscillator", Manufacturer_Name=ABRACON, Mouser Part Number=815-ABM825MHZD2XT, Arrow Part Number=ABM8-25.000MHZ-D2X-T, Arrow Price/Stock=https://www.arrow.com/en/products/abm8-25.000mhz-d2x-t/abracon?region=nac, Datasheet Link=https://abracon.com/Resonators/abm8.pdf, Height=0.8mm, Manufacturer_Part_Number=ABM8-25.000MHZ-D2X-T, Mouser Price/Stock=https://www.mouser.co.uk/ProductDetail/ABRACON/ABM8-25.000MHZ-D2X-T?qs=XeJtXLiO41RuPiM7CXbPRQ%3D%3D

## Via types
v1: diameter 23.62, hole 15.75, Top Layer to Bottom Layer, tented both sides, 217 vias

## Nets (pads, with @x,y where several pads share a name; then routed paths per layer and width w, separated by ;. In a path a pad name is that pad's centre, name@x,y a point inside that pad or via, vN(x,y) a via of type N, cw(c..) or ccw(c..) an arc to the next point about the centre after c; other vN are vias at no path point)
1v2a: C30.2 IC8.4 L2.2 | length 175.8
  Top Layer w10: IC8.4@498.27,1328.04 498.27,1378.82 526.73,1407.28 526.73,1429.81 532.8,1435.87 532.8,1439.81 546.57,1453.59 550.51,1453.59 L2.2@569.13,1472.21
1v2d: C19.2 C20.2 C21.2 C22.2 IC8.13 IC8.22 IC8.31 IC8.45 L1.2 L2.1 | length 1198.3
  Top Layer w10: C20.2@216.77,1090.32 218.74,1092.29 IC8.22@282.2,1092.29 320.47,1092.29 330.32,1102.13 330.94,1102.13 ; C21.2@456.93,924.97 456.93,936.78 458.9,938.75 IC8.31@458.9,994.34 458.9,1045.05 ; 560.45,1192.28 567.19,1192.28 575.96,1201.06 575.96,1201.14 584.32,1209.5 615,1209.5 IC8.45@615.91,1210.4 ; IC8.45@616.48,1209.83 678.46,1209.83 C22.2@689.21,1220.57
  Top Layer w15.75: L1.2@142.59,1450.56 150.46,1450.56 166.21,1434.81 166.21,1400.73 197.09,1369.85 208.9,1369.85 220.58,1358.17 220.58,1331.83 262.76,1289.65 IC8.13@262.76,1271.43 ; L1.2@149.84,1450.56 v1(149.84,1499.77) ; IC8.13@284.09,1271.34 331.03,1271.34 ; v1(555.35,1505.41) 555.35,1564.73 L2.1@563.23,1572.61
  Bottom Layer w15.75: v1(149.84,1499.77) 151.97,1499.77 155.91,1495.83 512.05,1495.83 520.12,1503.9 553.85,1503.9 v1(555.35,1505.41)
1v2o: C18.2 IC8.14 L1.1 | length 180.2
  Top Layer w10: C18.2@216.77,1275.36 216.77,1273.39 227.52,1262.65 233.38,1262.65 237.36,1262.65 249.33,1250.68 281.3,1250.68 IC8.14@282.2,1249.77
  Top Layer w15.75: L1.1@145.91,1336.39 161.62,1320.67 183.28,1320.67 208.9,1295.05 208.9,1283.24 C18.2@216.77,1275.36
3v3: C12.2 C14.2 C15.2 IC6.31 IC6.42 IC7.2 IC8.24 IC8.36 L3.1 R1.2 R3.2 | length 696.1
  Top Layer w10: v1(216.77,1003.71) C14.2@216.77,1043.08 226.61,1052.92 IC8.24@282.2,1052.92 ; v1(325.73,864.6) 374.91,864.6 R3.2@378.19,867.88 ; IC8.36@557.32,994.34 557.32,994.93 558.23,995.83 C15.2@681.34,995.83 ; v1(645.91,1019.46) 648.51,1016.85 662.29,1016.85 C15.2@681.34,997.8 ; R1.2@750.24,1523.39 IC7.2@750.24,1586.39 ; v1(787.64,1106.07) 791.32,1106.07 797.23,1111.98 IC6.42@847.17,1111.98 ; v1(792,1340.43) 795.69,1340.43 806.7,1329.42 846.26,1329.42 IC6.31@847.17,1328.51
  Top Layer w19.68: L3.1@468.74,1631.66 528.7,1631.66 530.67,1633.63 v1(531.73,1633.63) ; v1(669.53,1556.86) C12.2@669.53,1590.32 670.51,1589.34 IC7.2@742.15,1589.34 ; IC7.2@742.36,1588.35 748.27,1588.35 IC7.2@750.24,1586.39
3v3a: C16.2 C17.2 C23.2 C24.2 IC8.8 IC8.15 L3.2 T1.2 T1.7 | length 2233.6
  Top Layer w10: C17.2@216.77,1228.12 218.74,1230.09 IC8.15@282.2,1230.09 339.63,1230.09 373.09,1196.62 v1(374.25,1196.62) ; v1(411.46,1267.6) 411.46,1271.29 419.53,1279.35 IC8.8@419.53,1328.04 420.43,1328.95 420.43,1359.62 428.79,1367.98 443.15,1367.98 ; C16.2@443.15,1401.35 443.15,1367.98 ; L3.2@468.74,1517.49 477.83,1508.39 477.83,1379.39 466.43,1367.98 457.29,1367.98 443.15,1367.98
  Top Layer w15.75: v1(417.56,1531.27) 454.96,1531.27 L3.2@468.74,1517.49 ; v1(1339,1531) 1340.51,1532.51 1354.51,1532.51 1367.09,1545.09 1367.09,1565.53 C24.2@1374.56,1573 1440,1573 1463,1550 v1(1550,1550) ; C23.2@1526.56,1246 1534.43,1253.87 1534.43,1265.73 v1@1553.02,1284.32
  Bottom Layer w15.75: v1(417.56,1531.27) 417.69,1531.13 1338.87,1531.13 v1(1339,1531) ; T1.2@1474.36,1299 1539.2,1299 v1(1553.89,1284.32) 1553.89,1286.45 1576,1308.56 1576,1524 v1(1550,1550) 1549.5,1549.5 1474.86,1549.5 T1.7@1474.36,1549
5V: C1.1 C2.1 C3.2 C4.2 C5.2 C6.2 C7.2 C8.2 C9.2 C10.2 C11.2 C40.2 IC1.20 IC2.8 IC3.20 IC4.6 IC4.16 IC5.14 IC6.7 IC6.18 IC7.3 IC9.6 IC9.16 IC11.16 IC12.5 IC13.5 IC14.1 IC14.20 PL5_SK13.17 PL6_SK15.12 R19.2 | length 1659.2
  Top Layer w10: IC6.7@1145.43,1111.98 1146.34,1111.07 1194.28,1111.07 1220.05,1085.29 1232.69,1085.29 C8.2@1243,1074.98 ; IC6.18@1145.43,1328.51 1146.34,1329.42 1174.21,1329.42 1188.15,1329.42 1189.21,1330.48 C9.2@1212.83,1330.48 ; C9.2@1222.44,1342 1227.8,1347.35 v1(1227.8,1374.71) ; C8.2@1243,1073.56 C8.2@1243,1074.98 ; v1(1243,1108) C8.2@1243,1074.98 ; C8.2@1243.44,1074 1243.44,1074.54 C8.2@1243,1074.98 ; C10.2@1750.97,1058.05 1752,1059.08 C10.2@1752,1060.14 ; C10.2@1750.97,1059.11 C10.2@1752,1060.14 ; v1(1752,1101) C10.2@1752,1060.14 ; IC9.16@1811.2,1069.86 1761.72,1069.86 C10.2@1752,1060.14 ; IC4.6@1857.46,1202.73 1858.23,1201.96 1858.23,1156.77 v1(1859,1156) ; IC9.6@2061.2,855.29 2061.6,855.68 2061.6,931.67 v1(2061.99,932.06) ; v1(2174,430) 2219.02,430 IC14.1@2222,432.98 ; v1(2214,1474) 2214,1437.54 C5.2@2215.54,1436 2273.72,1436 IC5.14@2274.2,1436.47 ; R19.2@2465.92,1574.07 2466.85,1575 v1(2509,1575) ; IC13.5@2760.21,1560.4 2760.51,1560.7 2802.7,1560.7 v1(2803,1561) ; IC2.8@2926.17,1284.43 C7.2@2926.17,1341.17 ; C7.2@2936.01,1349.39 2939.94,1345.45 v1(2979.31,1345.45) ; IC12.5@3290.6,437.21 3290.6,427.81 3297.41,421 v1(3321,421) ; v1(3409.19,587.69) C40.2@3461.13,587.69 ; IC11.16@3461,523.28 3461,587.56 C40.2@3461.13,587.69 ; C40.2@3464.44,591 C40.2@3461.13,587.69 ; IC3.20@3637.48,745.54 v1(3767.5,745.54)
  Top Layer w15.75: IC7.3@827.59,1625.65 830.25,1628.31 897.48,1628.31 C11.2@897.87,1628.71 ; C11.2@896.46,1630.12 C11.2@897.87,1628.71 ; v1(935.74,1627.26) 899.32,1627.26 C11.2@897.87,1628.71 ; v1(1530.06,1364.06) 1531.57,1365.57 1531.57,1387.08 C4.2@1536.51,1392.01 ; C4.2@1543.36,1398 1601.56,1398 1607.46,1403.91 IC4.16@1607.46,1417.3 ; IC1.20@1706.6,479.79 1794.75,479.79 C6.2@1799.67,474.87 1805.3,480.49 1842.49,480.49 v1(1844,482)
  Top Layer w19.68: C2.1@941.95,738 v1(1038,738) ; C1.1@2462.43,1002 2464.43,1000 v1(2547,1000)
/BL: PL6_SK15.2
/EFIQ: PL5_SK13.1
/IOGT: PL6_SK15.4
/IORQ: IC11.1 PL6_SK15.3 | length 2436.3
  Top Layer w10: PL6_SK15.3@1489,241 1533.47,285.47 2438.53,285.47 v1(2459,265) ; v1(2556,267) 2651,172 3493.49,172 3586.31,264.82 3586.31,343.12 3579.3,350.13 3485.69,350.13 3461,325.45 IC11.1@3461,308.72
  Bottom Layer w10: v1(2459,265) 2460,266 2555,266 v1(2556,267)
/MS: PL6_SK15.8
/PIRQ: PL6_SK15.11 Q2.3 R19.1 | length 1577
  Top Layer w10: v1(2359,1516) 2359,1519.69 2374.64,1535.32 2374.64,1578.27 2391.64,1595.27 Q2.3@2392.61,1595.27 2414.61,1617.27 ; Q2.3@2414.61,1612.27 2414.61,1617.27 ; R19.1@2456.79,1636.95 2434.29,1636.95 2414.61,1617.27 ; R19.1@2465.92,1633.13 2468.87,1633.13 R19.1@2470.34,1634.59
  Bottom Layer w10: PL6_SK15.11@2289,241 2289,506 2463,680 2463,773 2357,879 2357,1514 v1(2359,1516)
/PRE_IORD: IC14.5 PL6_SK15.9 | length 644.4
  Top Layer w10: v1(2147,522) 2266.65,522 2267.36,521.28 2380.72,521.28 2421.5,480.5 2421.5,433.48 IC14.5@2422,432.98
  Bottom Layer w10: PL6_SK15.9@2089,241 2089,464 2120.7,495.7 v1(2147,522)
/PS: IC11.15 IC14.2
/PWE_IOWR: IC14.6 PL6_SK15.1 | length 1300.1
  Top Layer w10: v1(2020,401) 2023.29,401 2042.29,382 2458.35,382 2464.2,387.86 2464.2,425.18 IC14.6@2472,432.98
  Bottom Layer w10: PL6_SK15.1@1289,241 1374.88,326.88 1945.88,326.88 v1(2020,401)
/RST: IC5.12 IC5.13 PL5_SK13.15 | length 1738.3
  Top Layer w10: IC5.13@2324.2,1436.47 2331.49,1443.77 2331.49,1481.49 2339,1489 v1(2379.72,1489) ; IC5.12@2374.2,1436.47 2374.6,1436.87 2374.6,1488.6 v1@2375,1489
  Bottom Layer w10: v1(2379.72,1489) 2377.11,1486.39 2377.11,1478.44 2375,1476.33 2375,891 2764,502 PL5_SK13.15@2764,66
/S2: PL5_SK13.3
/WBE: PL5_SK13.2
B/PRE_IORD: IC2.32 IC5.10 IC6.17 IC14.15 | length 3048.6
  Top Layer w10: IC6.17@1145.43,1308.83 1184.67,1308.83 1244.49,1249 1352,1249 1411.83,1308.83 1603.83,1308.83 1640.29,1345.29 2372.04,1345.29 2450.5,1266.84 2450.5,1181.86 2475.35,1157 v1(2476,1157) 3063.96,569.04 IC2.32@3063.96,508.83 ; IC14.15@2472,805.02 2474,807.02 2474,864 v1(2476,866) ; IC5.10@2474.2,1436.47 2475.1,1435.57 2475.1,1381.9 v1(2476,1381)
  Bottom Layer w10: v1(2476,866) v1(2476,1381)
B/PS: IC1.19 IC4.5 IC5.2 IC14.18 | length 4101.2
  Top Layer w10: v1(1633,640) 1633.42,640 1657.8,615.62 1657.8,501.73 IC1.19@1656.8,500.73 ; v1(1633,1139) 1632.15,1139.85 1632.15,1237.13 1681.02,1286 1807.46,1286 ; IC1.19@1656.6,498.53 1655.28,497.21 1655.28,404.72 1726.81,333.19 3120.68,333.19 3267.49,480 3497.06,480 3502.92,485.86 3502.92,515.2 3511,523.28 ; IC4.5@1807.46,1202.73 1807.46,1286 ; IC14.18@2322,805.02 2322,863.55 2350,891.55 2350,1147 2324.2,1172.8 IC5.2@2324.2,1222.93 2316.4,1230.72 2316.4,1258 2288.4,1286 1807.46,1286
  Bottom Layer w10: v1(1633,640) v1(1633,1139)
B/PWE_IOWR: IC2.7 IC5.4 IC6.16 IC14.14 | length 2478.2
  Top Layer w10: IC6.16@1144.53,1288.24 IC6.16@1145.43,1289.14 1181.86,1289.14 1241,1230 1406.55,1230 1426.55,1210 1550,1210 1657.81,1317.81 2377.03,1317.81 2420.94,1273.9 IC5.4@2420.94,1222.93 ; IC5.4@2424.2,1222.93 2424.2,1164.8 2510.39,1078.61 2521.39,1078.61 v1(2524,1076) ; IC14.14@2522,805.02 2522.5,805.52 2522.5,867.5 v1(2523,868) ; v1(2863.09,1072.9) 2866.78,1072.9 2945.85,1151.97 IC2.7@2945.85,1284.43
  Bottom Layer w10: v1(2523,868) 2523.5,868.5 2523.5,1075.5 v1(2524,1076) 2525.55,1074.45 2861.55,1074.45 v1(2863.09,1072.9)
B/RST: IC3.1 IC5.11 IC6.19 | length 3089.7
  Top Layer w10: IC6.19@1145.43,1348.2 1100.74,1348.2 1094.88,1354.05 1094.88,1462.58 1100.74,1468.43 1178,1468.43 1215.57,1506 1504,1506 1512.4,1497.6 1601.4,1497.6 1633,1466 1988,1466 2064.05,1389.95 2422.18,1389.95 2424.2,1391.97 IC5.11@2424.2,1436.47 ; IC5.11@2422.18,1436.47 2431.99,1446.28 2431.99,1482.14 2437.85,1488 2530.91,1488 2549.83,1469.08 2549.83,1402.6 2558.15,1394.28 2895.42,1394.28 2903.24,1402.1 3398.9,1402.1 3638.94,1162.06 3638.94,1115.54 IC3.1@3639.94,1114.54
BD0: IC1.11 PL5_SK13.7 | length 1156.6
  Top Layer w10: IC1.11@1256.6,497.54 1256.6,373.08 1189,305.48 1189,199 1275.53,112.47 1917.53,112.47 PL5_SK13.7@1964,66
BD1: IC1.12 PL5_SK13.8 | length 1252
  Top Layer w10: IC1.12@1306.6,498.53 1306.6,400.59 1204.91,298.89 1204.91,205.59 1282.12,128.38 2001.62,128.38 PL5_SK13.8@2064,66
BD2: IC1.13 PL5_SK13.9 | length 1346.3
  Top Layer w10: IC1.13@1356.6,498.53 1356.6,428.09 1220.81,292.3 1220.81,212.18 1288.7,144.28 2085.72,144.28 PL5_SK13.9@2164,66
BD3: IC1.14 PL5_SK13.10 | length 1440.7
  Top Layer w10: IC1.14@1406.6,498.53 1402,493.93 1402,451 1236.72,285.72 1236.72,218.76 1295.29,160.19 2169.81,160.19 PL5_SK13.10@2264,66
BD4: IC1.15 PL5_SK13.11 | length 1423.6
  Top Layer w10: IC1.15@1456.6,498.53 1456.6,382.6 1339,265 1339,207.09 1370,176.09 2253.91,176.09 PL5_SK13.11@2364,66
BD5: IC1.16 PL5_SK13.12 | length 1398.7
  Top Layer w10: IC1.16@1506.6,498.53 1506.6,353.6 1437,284 1437,219 1464,192 2338,192 PL5_SK13.12@2464,66
BD6: IC1.17 PL5_SK13.13 | length 1293
  Top Layer w10: IC1.17@1556.6,498.53 1560,495.13 1560,451 1709.62,301.38 2466.12,301.38 2564,203.49 PL5_SK13.13@2564,66
BD7: IC1.18 PL5_SK13.14 | length 1313.4
  Top Layer w10: IC1.18@1606.6,498.53 1610,495.13 1610,424 1716.72,317.28 2472.7,317.28 2664,125.99 PL5_SK13.14@2664,66
BLA2: IC2.20 IC6.13 IC14.17 | length 2787
  Top Layer w10: IC6.13@1145.43,1230.09 1146.34,1229.18 1173.36,1229.18 1175.33,1227.21 1197.77,1227.21 1226.8,1198.19 1370.12,1198.19 1386.31,1182 v1(1390,1182) ; v1(2151,577.1) 2151.94,578.04 2189.78,578.04 2196.59,584.85 2793.9,584.85 2827.74,551.01 IC2.20@2827.74,508.83 ; v1(2370,750.72) 2371,751.72 2371,804.02 IC14.17@2372,805.02
  Bottom Layer w10: v1(1390,1182) 1371,1163 1371,839 1626.09,583.91 2119.19,583.91 2124.19,578.91 2150.13,578.91 v1@2151.47,577.57 ; v1(2151,577.1) 2151.94,577.1 2189.62,539.42 2237.54,539.42 2439.72,741.59 2439.72,760.41 2426.41,773.72 2393,773.72 v1(2370,750.72)